# Altium PCB BOARD 3.pcbdoc
Units mil, origin at the board's own origin, x right, y up, seen from the top; angles counter-clockwise.
Board outline 6225 x 7025 mil, 8 copper layers (TopLayer, MidLayer1, MidLayer2, MidLayer3, MidLayer4, MidLayer5, MidLayer6, BottomLayer); 253 components, 548 nets, 2588 pads, 0 vias.
Unrouted connection lines stored in the file: 1490.
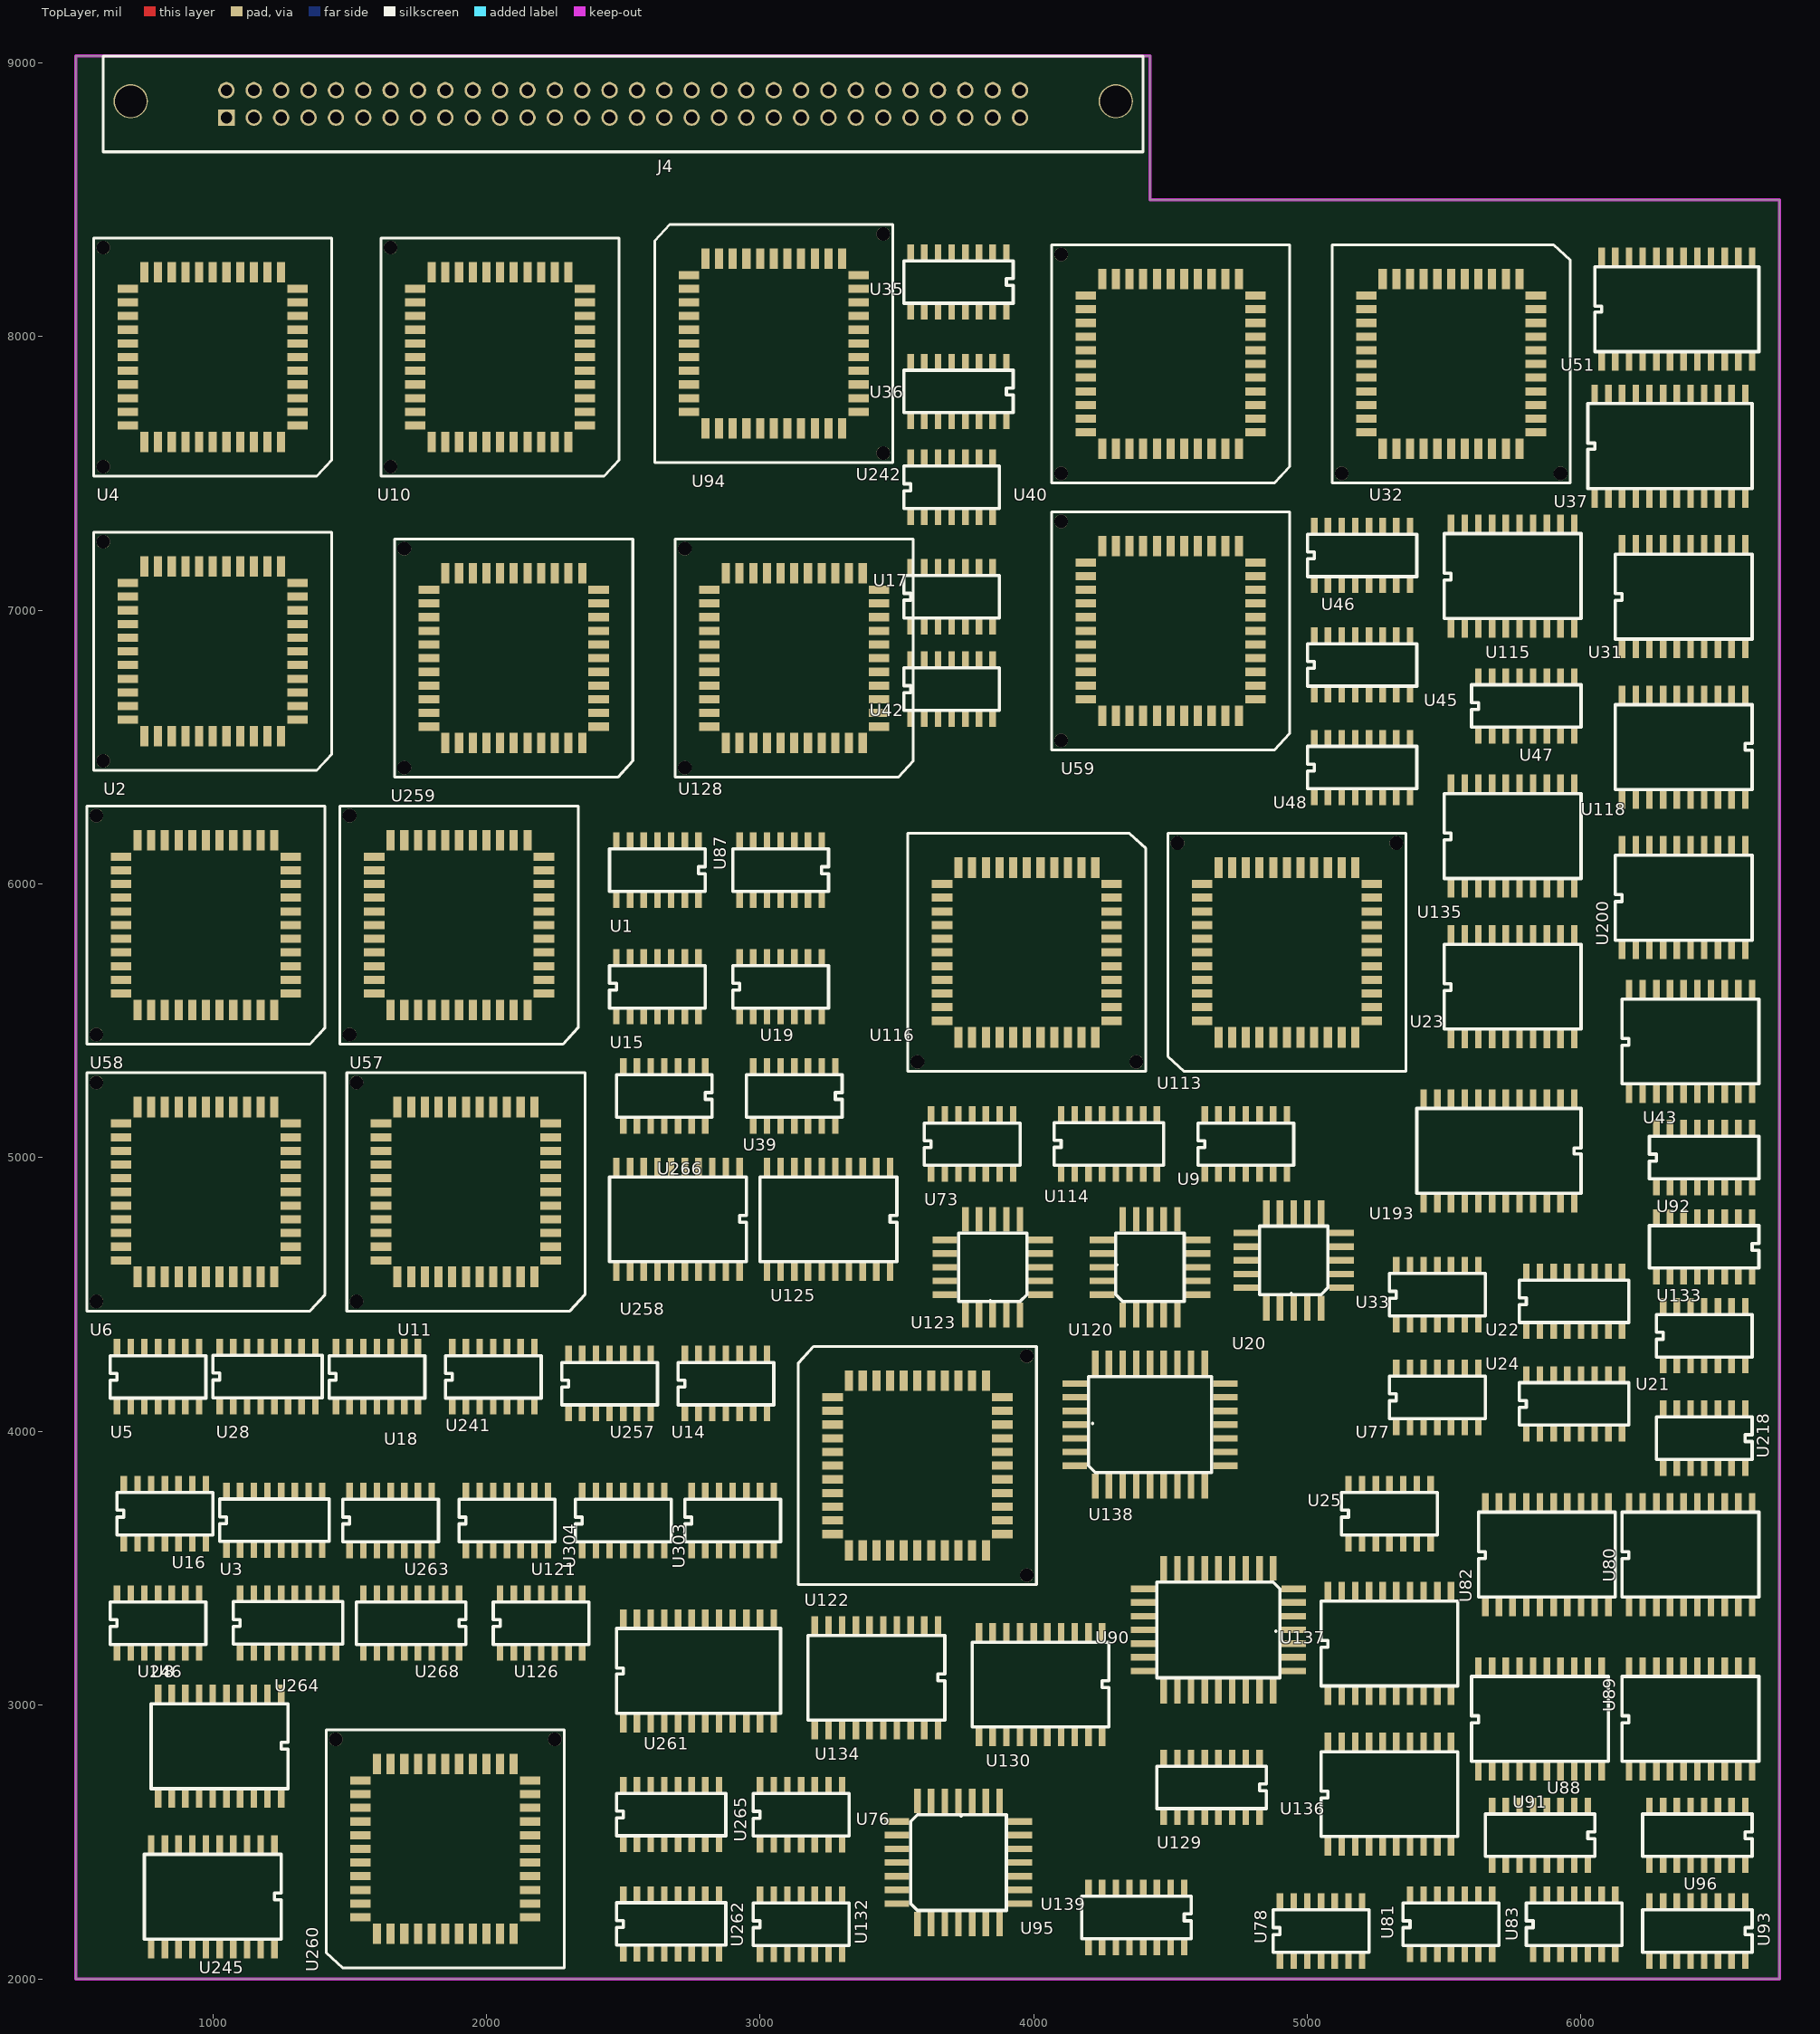
[diagram p0: TopLayer view]
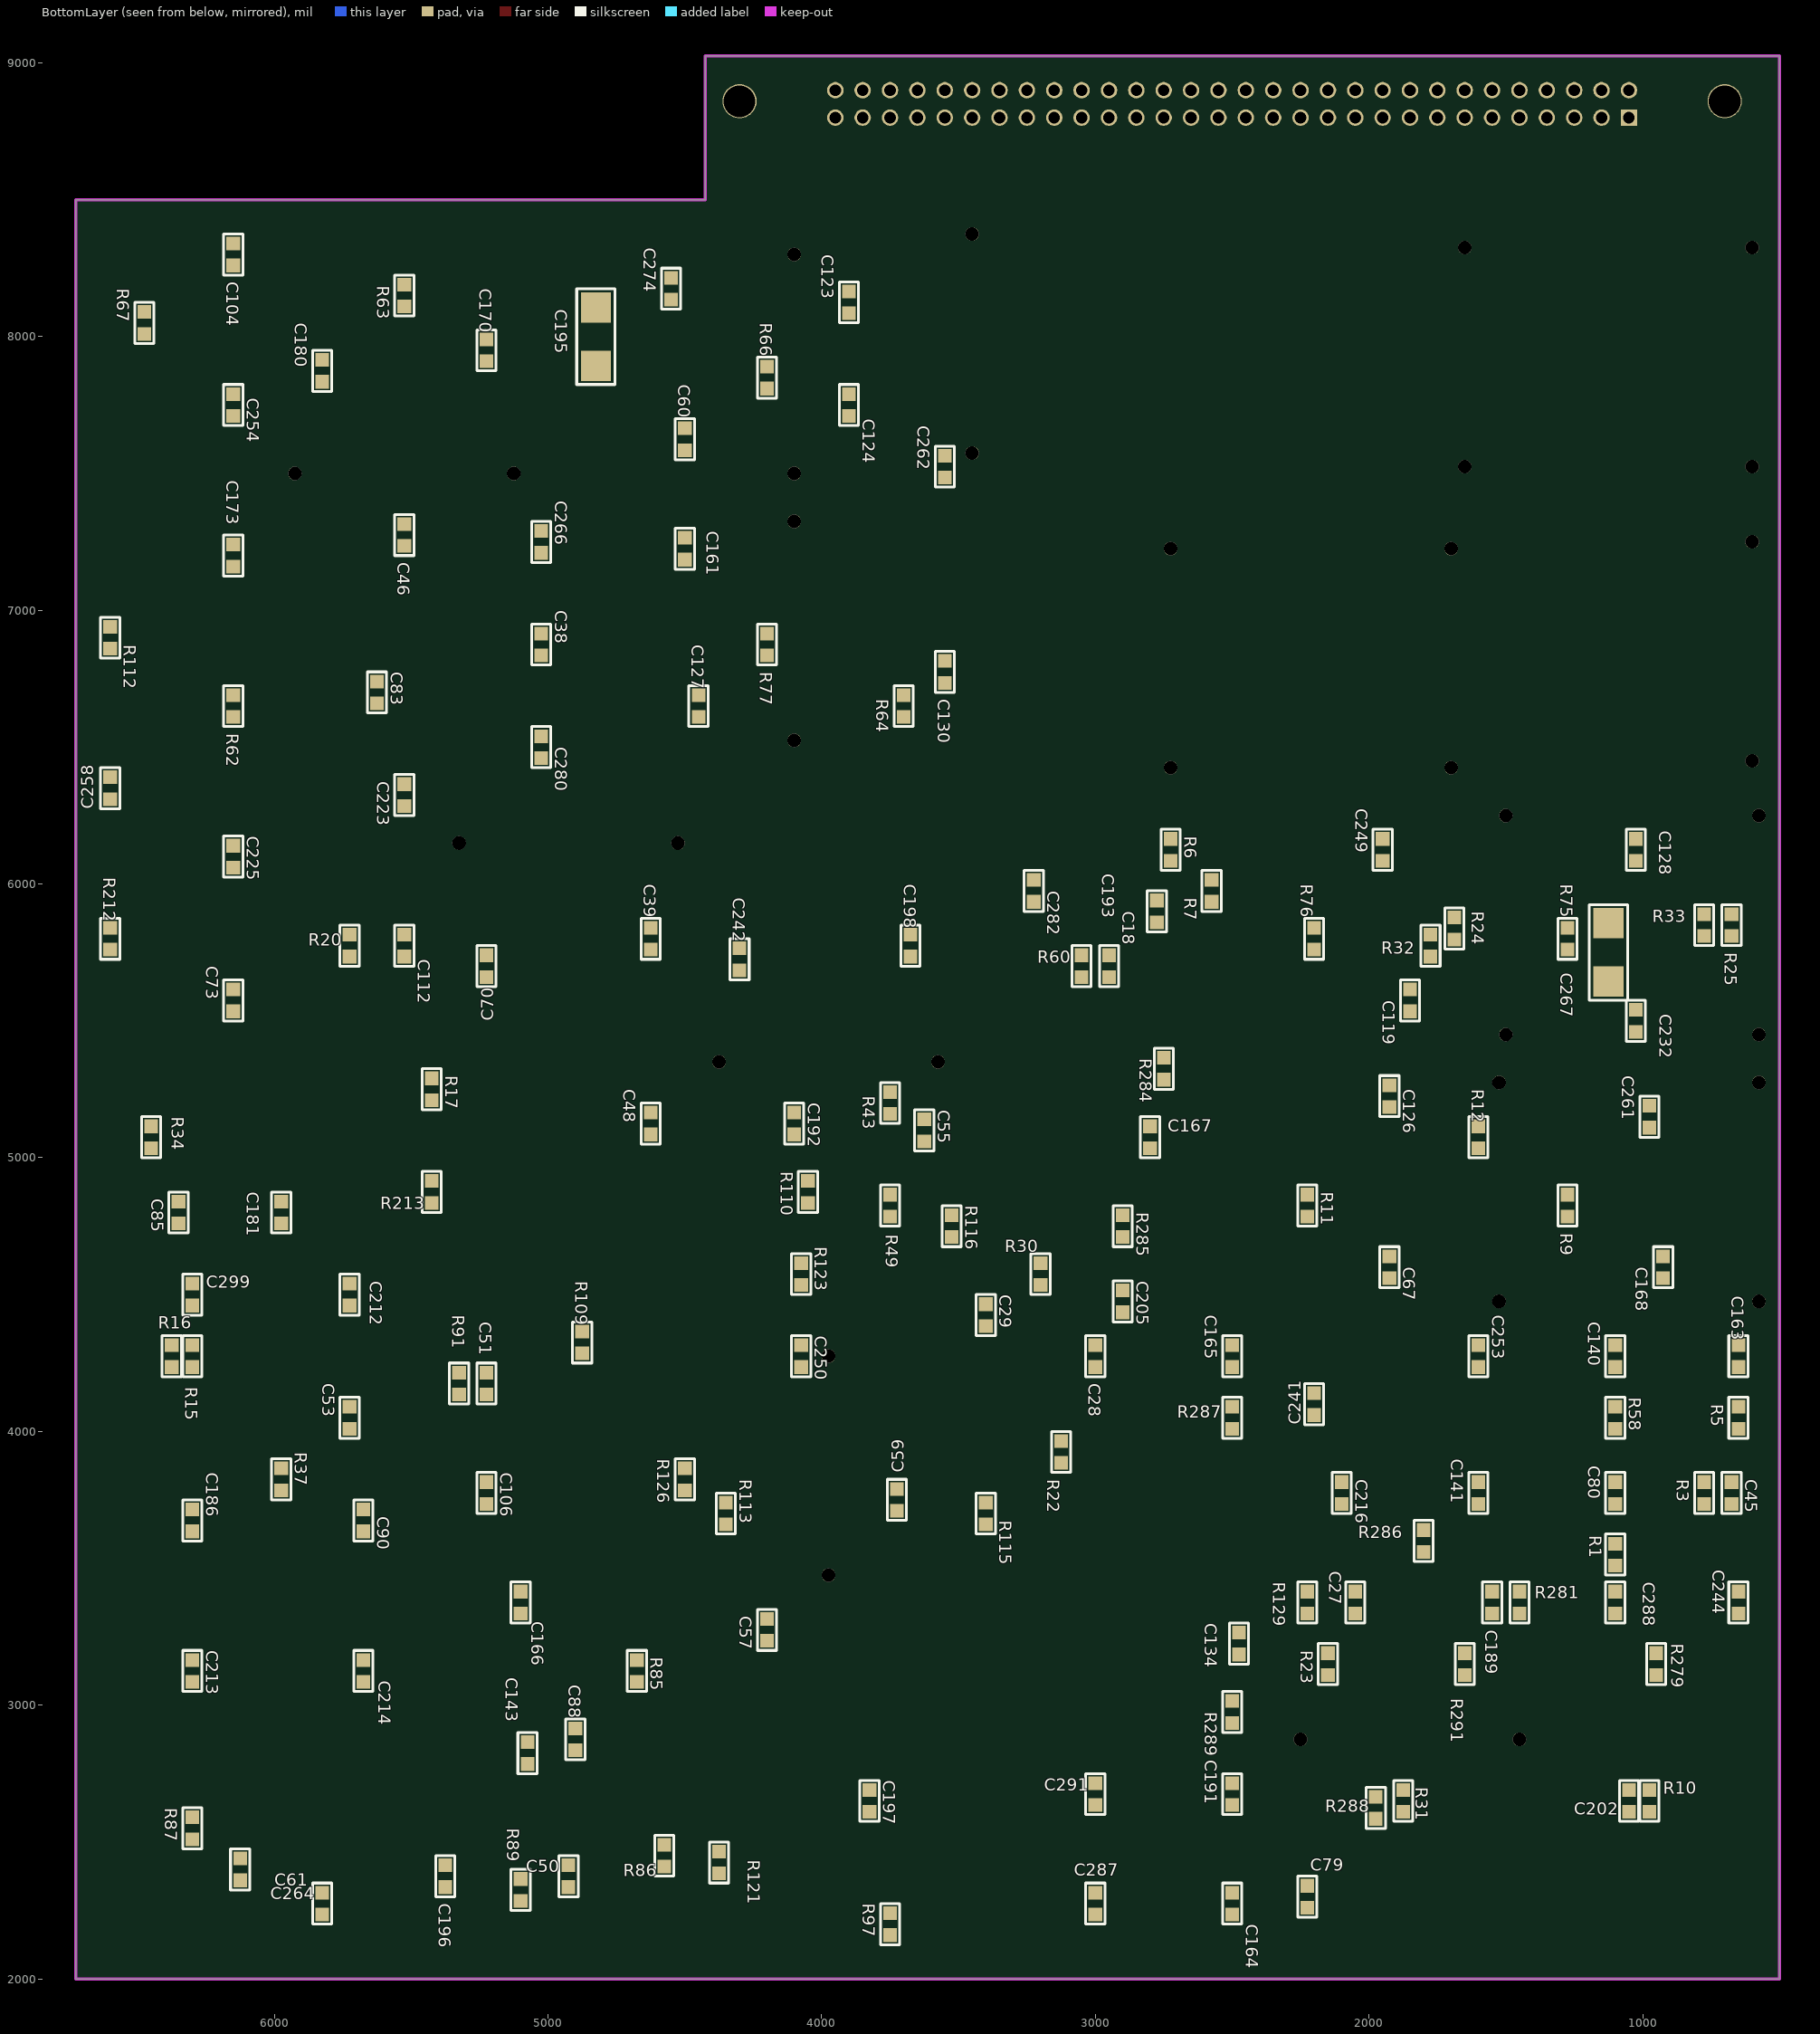
[diagram p1: BottomLayer view, seen from below]

## Layer stack, top to bottom
TopLayer: signal copper 1.4
Dielectric: core 12.6, FR-4, Dk 4.8
MidLayer1: signal copper 1.4
Dielectric: prepreg 12.6, FR-4, Dk 4.8
MidLayer2: signal copper 1.4
Dielectric: core 12.6, FR-4, Dk 4.8
MidLayer3: signal copper 1.4
Dielectric: prepreg 12.6, FR-4, Dk 4.8
MidLayer4: signal copper 1.4
Dielectric: core 12.6, FR-4, Dk 4.8
MidLayer5: signal copper 1.4
Dielectric: prepreg 12.6, FR-4, Dk 4.8
MidLayer6: signal copper 1.4
Dielectric: core 12.6, FR-4, Dk 4.8
BottomLayer: signal copper 1.4

## Board outline
500,2000 500,9025 4425,9025 4425,8500 6725,8500 6725,2000 500,2000

## Design rules (kind name [scope] priority, off if disabled: settings)
Clearance [All] p1: gap=6
FabricationTestPointUsage TestPointUsage [All] p1: valid=0 allowmultiple=FALSE
FabricationTestpoint Testpoint [All] p1: side=3 testpointundercomponent=TRUE minsize=40 maxsize=100 preferedsize=60 minholesize=20 maxholesize=40 preferedholesize=32 testpointgrid=1 allowsidetop=TRUE allowsidebottom=TRUE usegrid=TRUE gridtolerance=0.01
PlaneClearance [All] p1: clearance=10
PolygonConnect [All] p1: connectstyle=Relief reliefconductorwidth=10 reliefentries=4 polygonreliefangle="90 Angle"
RoutingTopology [InNet('GND')] p1: topology=Horizontal
RoutingTopology RoutingTopology_1 [InNet('VDD')] p2: topology=Horizontal
RoutingTopology RoutingTopology_2 [All] p3: topology=Shortest
RoutingVias [All] p1: holewidth=20 width=32 viastyle="Through Hole" minholewidth=20 minwidth=30 maxholewidth=28 maxwidth=50
SilkscreenOverComponentPads [All] p1: minsilkscreentomaskgap=10
SolderMaskExpansion [All] p1: expansion=2
Width Width_5 [InNet('N4')] p1: maxlimit=10 minlimit=10 preferedwidth=10
Width Width_4 [InNet('SCLK')] p2: maxlimit=10 minlimit=10 preferedwidth=10
Width Width_7 [InNet('SYMCLKM')] p3: maxlimit=10 minlimit=10 preferedwidth=10
Width Width_6 [InNet('SYMCLKN')] p4: maxlimit=10 minlimit=10 preferedwidth=10
Width Width_1 [InNet('GND1')] p5: maxlimit=10 minlimit=10 preferedwidth=10
Width [InNet('VDD1')] p6: maxlimit=10 minlimit=10 preferedwidth=10
Width Width_3 [InNet('SYMCLK')] p7: maxlimit=10 minlimit=10 preferedwidth=10
Width Width_2 [InNet('SYMCLK1')] p8: maxlimit=10 minlimit=10 preferedwidth=10
Width Width_8 [InNet('N22')] p9: maxlimit=10 minlimit=10 preferedwidth=10
Width Width_13 [InNet('5MHZ')] p10: maxlimit=20 minlimit=20 preferedwidth=20
Width Width_14 [InNet('VDD')] p11: maxlimit=20 minlimit=20 preferedwidth=20
Width Width_15 [InNet('GND')] p12: maxlimit=20 minlimit=20 preferedwidth=20
Width Width_12 [InNet('SYMCLK2')] p13: maxlimit=20 minlimit=20 preferedwidth=20
Width Width_9 [InNet('BITCLK1')] p14: maxlimit=10 minlimit=10 preferedwidth=10
Width Width_10 [InNet('BITCLK')] p15: maxlimit=10 minlimit=10 preferedwidth=10
Width Width_11 [InNet('20MHZ1')] p16: maxlimit=10 minlimit=10 preferedwidth=10
Width Width_16 [All] p17: maxlimit=6 minlimit=6 preferedwidth=6
23 further rules are at their usual default settings.

## Components (designator, comment, footprint, x,y, rotation, side; value= is the part's Value field where it differs from the comment)
C18 "C0805" 0805 2775,5900 r270 bottom
C27 "C0805" 0805 2050,3375 r270 bottom
C28 "C0805" 0805 3000,4275 r270 bottom
C29 "C0805" 0805 3400,4425 r270 bottom
C38 "C0805" 0805 5025,6875 r270 bottom
C39 "C0805" 0805 4625,5800 r270 bottom
C45 "C0805" 0805 675,3775 r270 bottom
C46 "C0805" 0805 5525,7275 r270 bottom
C48 "C0805" 0805 4625,5125 r270 bottom
C50 "C0805" 0805 4925,2375 r270 bottom
C51 "C0805" 0805 5225,4175 r270 bottom
C53 "C0805" 0805 5725,4050 r270 bottom
C55 "C0805" 0805 3625,5100 r270 bottom
C57 "C0805" 0805 4200,3275 r270 bottom
C59 "C0805" 0805 3725,3750 r90 bottom
C60 "C0805" 0805 4500,7625 r270 bottom
C61 "C0805" 0805 6125,2400 r90 bottom
C67 "C0805" 0805 1925,4600 r270 bottom
C70 "C0805" 0805 5225,5700 r90 bottom
C73 "C0805" 0805 6150,5575 r270 bottom
C79 "C0805" 0805 2225,2300 r90 bottom
C80 "C0805" 0805 1100,3775 r270 bottom
C83 "C0805" 0805 5625,6700 r270 bottom
C85 "C0805" 0805 6350,4800 r270 bottom
C88 "C0805" 0805 4900,2875 r90 bottom
C90 "C0805" 0805 5675,3675 r270 bottom
C104 "C0805" 0805 6150,8300 r270 bottom
C106 "C0805" 0805 5225,3775 r270 bottom
C112 "C0805" 0805 5525,5775 r270 bottom
C119 "C0805" 0805 1850,5575 r90 bottom
C123 "C0805" 0805 3900,8125 r90 bottom
C124 "C0805" 0805 3900,7750 r90 bottom
C126 "C0805" 0805 1925,5225 r270 bottom
C127 "C0805" 0805 4450,6650 r90 bottom
C128 "C0805" 0805 1025,6125 r270 bottom
C130 "C0805" 0805 3550,6775 r270 bottom
C134 "C0805" 0805 2475,3225 r270 bottom
C140 "C0805" 0805 1100,4275 r270 bottom
C141 "C0805" 0805 1600,3775 r270 bottom
C143 "C0805" 0805 5075,2825 r270 bottom
C161 "C0805" 0805 4500,7225 r90 bottom
C163 "C0805" 0805 650,4275 r270 bottom
C164 "C0805" 0805 2500,2275 r270 bottom
C165 "C0805" 0805 2500,4275 r270 bottom
C166 "C0805" 0805 5100,3375 r270 bottom
C167 "C0805" 0805 2800,5075 r270 bottom
C168 "C0805" 0805 925,4600 r90 bottom
C170 "C0805" 0805 5225,7950 r270 bottom
C173 "C0805" 0805 6150,7200 r270 bottom
C180 "C0805" 0805 5825,7875 r90 bottom
C181 "C0805" 0805 5975,4800 r270 bottom
C186 "C0805" 0805 6300,3675 r270 bottom
C189 "C0805" 0805 1550,3375 r90 bottom
C191 "C0805" 0805 2500,2675 r270 bottom
C192 "C0805" 0805 4100,5125 r270 bottom
C193 "C0805" 0805 2950,5700 r270 bottom
C195 "6032JK" 6032JK 4825,8000 r270 bottom
C196 "C0805" 0805 5375,2375 r270 bottom
C197 "C0805" 0805 3825,2650 r270 bottom
C198 "C0805" 0805 3675,5775 r270 bottom
C202 "C0805" 0805 1050,2650 r270 bottom
C205 "C0805" 0805 2900,4475 r270 bottom
C212 "C0805" 0805 5725,4500 r90 bottom
C213 "C0805" 0805 6300,3125 r270 bottom
C214 "C0805" 0805 5675,3125 r270 bottom
C216 "C0805" 0805 2100,3775 r270 bottom
C223 "C0805" 0805 5525,6325 r270 bottom
C225 "C0805" 0805 6150,6100 r270 bottom
C232 "C0805" 0805 1025,5500 r90 bottom
C241 "C0805" 0805 2200,4100 r270 bottom
C242 "C0805" 0805 4300,5725 r90 bottom
C244 "C0805" 0805 650,3375 r270 bottom
C249 "C0805" 0805 1950,6125 r270 bottom
C250 "C0805" 0805 4075,4275 r270 bottom
C253 "C0805" 0805 1600,4275 r270 bottom
C254 "C0805" 0805 6150,7750 r270 bottom
C258 "C0805" 0805 6600,6350 r90 bottom
C261 "C0805" 0805 975,5150 r90 bottom
C262 "C0805" 0805 3550,7525 r90 bottom
C264 "C0805" 0805 5825,2275 r270 bottom
C266 "C0805" 0805 5025,7250 r270 bottom
C267 "6032JK" 6032JK 1125,5750 r90 bottom
C274 "C0805" 0805 4550,8175 r270 bottom
C280 "C0805" 0805 5025,6500 r270 bottom
C282 "C0805" 0805 3225,5975 r270 bottom
C287 "C0805" 0805 3000,2275 r270 bottom
C288 "C0805" 0805 1100,3375 r90 bottom
C291 "C0805" 0805 3000,2675 r270 bottom
C299 "C0805" 0805 6300,4500 r90 bottom
J4 "CONN\60P" CONN\60P 1050,8800 r0 top
R1 "R0805" 0805 1100,3550 r90 bottom
R3 "R0805" 0805 775,3775 r270 bottom
R5 "R0805" 0805 650,4050 r90 bottom
R6 "R0805" 0805 2725,6125 r90 bottom
R7 "R0805" 0805 2575,5975 r270 bottom
R9 "R0805" 0805 1275,4825 r270 bottom
R10 "R0805" 0805 975,2650 r90 bottom
R11 "R0805" 0805 2225,4825 r270 bottom
R12 "R0805" 0805 1600,5075 r90 bottom
R15 "R0805" 0805 6300,4275 r270 bottom
R16 "R0805" 0805 6375,4275 r270 bottom
R17 "R0805" 0805 5425,5250 r270 bottom
R20 "R0805" 0805 5725,5775 r90 bottom
R22 "R0805" 0805 3125,3925 r90 bottom
R23 "R0805" 0805 2150,3150 r90 bottom
R24 "R0805" 0805 1687.5,5837.5 r90 bottom
R25 "R0805" 0805 675,5850 r270 bottom
R30 "R0805" 0805 3200,4575 r270 bottom
R31 "R0805" 0805 1875,2650 r90 bottom
R32 "R0805" 0805 1775,5775 r90 bottom
R33 "R0805" 0805 775,5850 r270 bottom
R34 "R0805" 0805 6450,5075 r90 bottom
R37 "R0805" 0805 5975,3825 r90 bottom
R43 "R0805" 0805 3750,5200 r270 bottom
R49 "R0805" 0805 3750,4825 r90 bottom
R58 "R0805" 0805 1100,4050 r90 bottom
R60 "R0805" 0805 3050,5700 r90 bottom
R62 "R0805" 0805 6150,6650 r270 bottom
R63 "R0805" 0805 5525,8150 r270 bottom
R64 "R0805" 0805 3700,6650 r270 bottom
R66 "R0805" 0805 4200,7850 r270 bottom
R67 "R0805" 0805 6475,8050 r90 bottom
R75 "R0805" 0805 1275,5800 r270 bottom
R76 "R0805" 0805 2200,5800 r270 bottom
R77 "R0805" 0805 4200,6875 r270 bottom
R85 "R0805" 0805 4675,3125 r270 bottom
R86 "R0805" 0805 4575,2450 r270 bottom
R87 "R0805" 0805 6300,2550 r270 bottom
R89 "R0805" 0805 5100,2325 r270 bottom
R91 "R0805" 0805 5325,4175 r270 bottom
R97 "R0805" 0805 3750,2200 r270 bottom
R109 "R0805" 0805 4875,4325 r270 bottom
R110 "R0805" 0805 4050,4875 r90 bottom
R112 "R0805" 0805 6600,6900 r90 bottom
R113 "R0805" 0805 4350,3700 r90 bottom
R115 "R0805" 0805 3400,3700 r270 bottom
R116 "R0805" 0805 3525,4750 r90 bottom
R121 "R0805" 0805 4375,2425 r270 bottom
R123 "R0805" 0805 4075,4575 r270 bottom
R126 "R0805" 0805 4500,3825 r90 bottom
R129 "R0805" 0805 2225,3375 r90 bottom
R212 "R0805" 0805 6600,5800 r270 bottom
R213 "R0805" 0805 5425,4875 r90 bottom
R279 "R0805" 0805 950,3150 r270 bottom
R281 "R0805" 0805 1450,3375 r90 bottom
R284 "R0805" 0805 2750,5325 r270 bottom
R285 "R0805" 0805 2900,4750 r90 bottom
R286 "R0805" 0805 1800,3600 r90 bottom
R287 "R0805" 0805 2500,4050 r90 bottom
R288 "R0805" 0805 1975,2625 r90 bottom
R289 "R0805" 0805 2500,2975 r270 bottom
R291 "R0805" 0805 1650,3150 r90 bottom
U1 "74ALS74" DIP14\SO 2625,6050 r180 top
U2 "MSSY-44S" CC44AMP 1000,6850 r0 top
U3 "74AS174" DIP16\SO 1225,3675 r0 top
U4 "MSYM-44S" CC44AMP 1000,7925 r0 top
U5 "74ALS74" DIP14\SO 800,4200 r0 top
U6 "SLT-44S" CC44AMP 975,4875 r0 top
U8 "74AS11" DIP14\SO 800,3300 r0 top
U9 "74ALS00" DIP14\SO 4775,5050 r0 top
U10 "TXMSG-44S" CC44AMP 2050,7925 r0 top
U11 "MSG-44S" CC44AMP 1925,4875 r0 top
U14 "74AS32" DIP14\SO 2875,4175 r0 top
U15 "74ALS08" DIP14\SO 2625,5625 r0 top
U16 "74ALS74" DIP14\SO 825,3700 r0 top
U17 "74ALS32" DIP14\SO 3700,7050 r0 top
U18 "74ALS74" DIP14\SO 1600,4200 r0 top
U19 "74ALS74" DIP14\SO 3075,5625 r0 top
U20 "BCGEN-P16V8-25" CC20 4950,4625 r0 top
U21 "74ALS74" DIP14\SO 6450,4350 r0 top
U22 "74ALS153" DIP16\SO 5975,4475 r0 top
U23 "74FCT574T" DIP20\SOL 5750,5625 r0 top
U24 "74ALS163" DIP16\SO 5975,4100 r0 top
U25 "74AS74" DIP14\SO 5300,3700 r0 top
U28 "74ALS175" DIP16\SO 1200,4200 r0 top
U31 "74FCT574T" DIP20\SOL 6375,7050 r0 top
U32 "PRM-44S" CC44AMP 5525,7900 r90 top
U33 "74AS08" DIP14\SO 5475,4500 r0 top
U35 "74ALS174" DIP16\SO 3725,8200 r180 top
U36 "74ALS174" DIP16\SO 3725,7800 r180 top
U37 "74FCT821T" DIP24\SOL 6325,7600 r0 top
U39 "74ALS08" DIP14\SO 3125,5225 r180 top
U40 "AGC-44S" CC44AMP 4500,7900 r0 top
U42 "74AS74" DIP14\SO 3700,6712.5 r0 top
U43 "74QCT244" DIP20\SOL 6400,5425 r0 top
U45 "74ALS174" DIP16\SO 5200,6800 r0 top
U46 "74ALS174" DIP16\SO 5200,7200 r0 top
U47 "74ALS174" DIP16\SO 5800,6650 r0 top
U48 "74ALS174" DIP16\SO 5200,6425 r0 top
U51 "74FCT821T" DIP24\SOL 6350,8100 r0 top
U57 "VAL-MACH210-20" CC44AMP 1900,5850 r0 top
U58 "TCTL_MACH210-20" CC44AMP 975,5850 r0 top
U59 "PCMP-MACH210-20" CC44AMP 4500,6925 r0 top
U73 "74ALS74" DIP14\SO 3775,5050 r0 top
U76 "74AS08" DIP14\SO 3150,2600 r0 top
U77 "74ALS74" DIP14\SO 5475,4125 r0 top
U78 "74ALS74" DIP14\SO 5050,2175 r0 top
U80 "74FCT245T" DIP20\SOL 6400,3550 r0 top
U81 "74AS32" DIP14\SO 5525,2200 r0 top
U82 "74FCT245T" DIP20\SOL 5875,3550 r0 top
U83 "74AS02" DIP14\SO 5975,2200 r0 top
U87 "74AS08" DIP14\SO 3075,6050 r180 top
U88 "74ALS169" DIP16\SO 5850,2525 r180 top
U89 "74FCT574T" DIP20\SOL 6400,2950 r0 top
U90 "AM7200-35A" CCR32 4675,3275 r90 top
U91 "74FCT574T" DIP20\SOL 5850,2950 r0 top
U92 "74ALS175" DIP16\SO 6450,5000 r0 top
U93 "74ALS169" DIP16\SO 6425,2175 r180 top
U94 "TXDMA-44S" CC44AMP 3050,7975 r180 top
U95 "DARB-P22V10-15" CC28 3725,2425 r180 top
U96 "74ALS169" DIP16\SO 6425,2525 r180 top
U113 "PEISR_MACH210-20" CC44AMP 4925,5750 r270 top
U114 "74AS174" DIP16\SO 4275,5050 r0 top
U115 "74FCT244T" DIP20\SOL 5750,7125 r0 top
U116 "PECMD-44S" CC44AMP 3975,5750 r90 top
U118 "74FCT573T" DIP20\SOL 6375,6500 r180 top
U120 "DMATO_PAL16V8-25" CC20 4425,4600 r270 top
U121 "74AS02" DIP14\SO 2075,3675 r0 top
U122 "PADD-44S" CC44AMP 3575,3875 r180 top
U123 "82S123" CC20 3850,4600 r0 top
U125 "74ALS521A" DIP20\SOL 3250,4775 r180 top
U126 "74ALS74" DIP14\SO 2200,3300 r0 top
U128 "RXDMA-44S" CC44AMP 3125,6825 r0 top
U129 "74ALS161" DIP16\SO 4650,2700 r180 top
U130 "74FCT574T" DIP20\SOL 4025,3075 r180 top
U132 "74ALS74" DIP14\SO 3150,2200 r0 top
U133 "74ALS161" DIP16\SO 6450,4675 r180 top
U134 "74FCT574T" DIP20\SOL 3425,3100 r180 top
U135 "74QCT244" DIP20\SOL 5750,6175 r0 top
U136 "74FCT574T" DIP20\SOL 5300,2675 r0 top
U137 "74FCT574T" DIP20\SOL 5300,3225 r0 top
U138 "AM7200-35A" CCR32 4425,4025 r270 top
U139 "74ALS161" DIP16\SO 4375,2225 r180 top
U193 "74ALS666" DIP24\SOL 5700,5025 r180 top
U200 "74FCT541T" DIP20\SOL 6375,5950 r0 top
U218 "74AS32" DIP14\SO 6450,3975 r180 top
U241 "74ALS04" DIP14\SO 2025,4200 r0 top
U242 "74ALS32" DIP14\SO 3700,7450 r0 top
U245 "74FCT540T" DIP20\SOL 1000,2300 r180 top
U246 "74FCT540T" DIP20\SOL 1025,2850 r180 top
U257 "74ALS74" DIP14\SO 2450,4175 r0 top
U258 "74ALS374" DIP20\SOL 2700,4775 r180 top
U259 "CRC-44S" CC44AMP 2100,6825 r0 top
U260 "FIF-44S" CC44AMP 1850,2475 r270 top
U261 "74FCT821T" DIP24\SOL 2775,3125 r0 top
U262 "74AS157" DIP16\SO 2675,2200 r0 top
U263 "74ALS74" DIP14\SO 1650,3675 r0 top
U264 "74F194" DIP16\SO 1275,3300 r0 top
U265 "74F166" DIP16\SO 2675,2600 r0 top
U266 "74ALS164" DIP14\SO 2650,5225 r180 top
U268 "74AS153" DIP16\SO 1725,3300 r180 top
U303 "74AS74" DIP14\SO 2900,3675 r0 top
U304 "74AS74" DIP14\SO 2500,3675 r0 top

## Footprints (in the part's own frame and the unit in brackets; to place one, negate y for a bottom-side part, rotate by r counter-clockwise, add the part's x,y. Pads: shape width x height; smd on the part's side, far side on the other; paste and mask are expansions set on the pad)
0805 [mil]
  rect 50x50 smd: 1(-40,0) 2(40,0)
  silkscreen extent -75,-35 75,35
6032JK [mil]
  rect 110x110 smd: 1(-106,0) 2(107,0)
  silkscreen extent -175,-70 175,70
CC20 [mil]
  rect 24x90 smd: 1(0,-175) 2(50,-175) 3(100,-175) 9(100,175) 10(50,175) 11(0,175) 12(-50,175) 13(-100,175) 19(-100,-175) 20(-50,-175)
  rect 90x24 smd: 4(175,-100) 5(175,-50) 6(175,0) 7(175,50) 8(175,100) 14(-175,100) 15(-175,50) 16(-175,0) 17(-175,-50) 18(-175,-100)
  silkscreen extent -125,-125 125,125
CC28 [mil]
  rect 24x90 smd: 1(0,-225) 2(50,-225) 3(100,-225) 4(150,-225) 12(150,225) 13(100,225) 14(50,225) 15(0,225) 16(-50,225) 17(-100,225) 18(-150,225) 26(-150,-225) 27(-100,-225) 28(-50,-225)
  rect 90x24 smd: 5(225,-150) 6(225,-100) 7(225,-50) 8(225,0) 9(225,50) 10(225,100) 11(225,150) 19(-225,150) 20(-225,100) 21(-225,50) 22(-225,0) 23(-225,-50) 24(-225,-100) 25(-225,-150)
  silkscreen extent -175,-175 175,175
CC44AMP [mil]
  rect 30x75 smd: 1(0,-310) 2(50,-310) 3(100,-310) 4(150,-310) 5(200,-310) 6(250,-310) 18(250,310) 19(200,310) 20(150,310) 21(100,310) 22(50,310) 23(0,310) 24(-50,310) 25(-100,310) 26(-150,310) 27(-200,310) 28(-250,310) 40(-250,-310) 41(-200,-310) 42(-150,-310) 43(-100,-310) 44(-50,-310)
  rect 75x30 smd: 7(310,-250) 8(310,-200) 9(310,-150) 10(310,-100) 11(310,-50) 12(310,0) 13(310,50) 14(310,100) 15(310,150) 16(310,200) 17(310,250) 29(-310,250) 30(-310,200) 31(-310,150) 32(-310,100) 33(-310,50) 34(-310,0) 35(-310,-50) 36(-310,-100) 37(-310,-150) 38(-310,-200) 39(-310,-250)
  round 50 hole 50: 45(-400,-400) 46(-400,400)
  silkscreen extent -435,-435 435,435
CCR32 [mil]
  rect 24x90 smd: 1(0,-275) 2(50,-275) 3(100,-275) 4(150,-275) 14(150,275) 15(100,275) 16(50,275) 17(0,275) 18(-50,275) 19(-100,275) 20(-150,275) 30(-150,-275) 31(-100,-275) 32(-50,-275)
  rect 90x24 smd: 5(225,-200) 6(225,-150) 7(225,-100) 8(225,-50) 9(225,0) 10(225,50) 11(225,100) 12(225,150) 13(225,200) 21(-225,200) 22(-225,150) 23(-225,100) 24(-225,50) 25(-225,0) 26(-225,-50) 27(-225,-100) 28(-225,-150) 29(-225,-200)
  silkscreen extent -175,-225 175,225
CONN\60P [mil]
  rect 60x60 / inner round 60 / far side rect 60x60 hole 42: 1(0,0)
  round 60 hole 42: 2(0,100) 3(100,0) 4(100,100) 5(200,0) 6(200,100) 7(300,0) 8(300,100) 9(400,0) 10(400,100) 11(500,0) 12(500,100) 13(600,0) 14(600,100) 15(700,0) 16(700,100) 17(800,0) 18(800,100) 19(900,0) 20(900,100) 21(1000,0) 22(1000,100) 23(1100,0) 24(1100,100) 25(1200,0) 26(1200,100) 27(1300,0) 28(1300,100) 29(1400,0) 30(1400,100) 31(1500,0) 32(1500,100) 33(1600,0) 34(1600,100) 35(1700,0) 36(1700,100) 37(1800,0) 38(1800,100) 39(1900,0) 40(1900,100) 41(2000,0) 42(2000,100) 43(2100,0) 44(2100,100) 45(2200,0) 46(2200,100) 47(2300,0) 48(2300,100) 49(2400,0) 50(2400,100) 51(2500,0) 52(2500,100) 53(2600,0) 54(2600,100) 55(2700,0) 56(2700,100) 57(2800,0) 58(2800,100) 59(2900,0) 60(2900,100)
  round 125 hole 116: 61(-350,60) 62(3250,60)
  silkscreen extent -450,-125 3350,225
DIP14\SO [mil]
  rect 24x60 smd: 1(-150,-108) 2(-100,-108) 3(-50,-108) 4(0,-108) 5(50,-108) 6(100,-108) 7(150,-108) 8(150,108) 9(100,108) 10(50,108) 11(0,108) 12(-50,108) 13(-100,108) 14(-150,108)
  silkscreen extent -175,-78 175,77
DIP16\SO [mil]
  rect 24x60 smd: 1(-175,-107) 2(-125,-107) 3(-75,-107) 4(-25,-107) 5(25,-107) 6(75,-107) 7(125,-107) 8(175,-107) 9(175,108) 10(125,108) 11(75,108) 12(25,108) 13(-25,108) 14(-75,108) 15(-125,108) 16(-175,108)
  silkscreen extent -200,-77 200,78
DIP20\SOL [mil]
  rect 24x70 smd: 1(-225,-190) 2(-175,-190) 3(-125,-190) 4(-75,-190) 5(-25,-190) 6(25,-190) 7(75,-190) 8(125,-190) 9(175,-190) 10(225,-190) 11(225,190) 12(175,190) 13(125,190) 14(75,190) 15(25,190) 16(-25,190) 17(-75,190) 18(-125,190) 19(-175,190) 20(-225,190)
  silkscreen extent -250,-155 250,155
DIP24\SOL [mil]
  rect 24x70 smd: 1(-275,-190) 2(-225,-190) 3(-175,-190) 4(-125,-190) 5(-75,-190) 6(-25,-190) 7(25,-190) 8(75,-190) 9(125,-190) 10(175,-190) 11(225,-190) 12(275,-190) 13(275,190) 14(225,190) 15(175,190) 16(125,190) 17(75,190) 18(25,190) 19(-25,190) 20(-75,190) 21(-125,190) 22(-175,190) 23(-225,190) 24(-275,190)
  silkscreen extent -300,-155 300,155

## Nets (pads, with @x,y where several pads share a name; then routed paths per layer and width w, separated by ;. In a path a pad name is that pad's centre, name@x,y a point inside that pad or via, vN(x,y) a via of type N, cw(c..) or ccw(c..) an arc to the next point about the centre after c; other vN are vias at no path point)
5MHZ: U14.10 U17.6 U32.13 U36.9 U40.35 U42.3
8MHZ: R24.2 R32.2 U23.14 U57.35
20MHZ: U95.2 U113.35 U114.9 U116.35 U120.1 U132.3 U132.11
20MHZ1: U78.3 U81.2 U88.2 U93.2 U94.13 U96.2 U128.13
$4N5: R213.2 U193.14
$4N6: U193.2 U193.23
$4N15: R212.2 U200.3 U200.4 U200.5 U200.6 U200.7 U200.8 U200.9
$4N155: U193.1 U200.1 U200.19
$7N690: U9.12 U218.6
$7N842: U218.4 U218.10
$9N686: U262.3 U265.13
$9N693: U257.5 U259.10
$9N802: R284.2 U266.2 U266.9
$9N1110: U257.2 U260.24
$9N1173: U257.12 U260.29
$9N1174: U258.3 U266.3
$9N1176: U258.4 U266.4
$9N1178: U258.7 U266.5
$9N1180: U258.8 U266.6
$9N1182: U258.13 U266.10
$9N1184: U258.14 U266.11
$9N1186: U258.17 U266.12
$9N1207: U121.4 U257.3 U257.11
$9N1210: U257.9 U258.11
$9N1235: U258.18 U266.13
$9N1239: R285.2 U258.1 U259.29
$9N1242: U265.1 U265.9
$9N1243: U259.13 U260.25
$9N1264: U259.31 U262.4
$9N1270: U259.32 U262.7
$9N1271: U259.2 U262.6
$9N1295: U261.10 U261.16 U262.2
$9N1318: U260.39 U263.5
$9N1368: U260.9 U263.9
$9N1385: U260.41 U262.10
$9N1389: U259.43 U260.3 U261.2
$9N1394: U14.13 U121.6 U260.43
$9N1441: U261.3 U261.23
$9N1443: U261.4 U261.22
$9N1445: U261.5 U261.21
$9N1448: U261.6 U261.20
$9N1450: U261.7 U261.19
$9N1453: U261.8 U261.18
$9N1455: U261.9 U261.17
$9N1458: U261.11 U261.15
$9N1481: U262.13 U262.14 U262.15
$9N1482: U260.4 U262.5 U262.11 U268.7
$9N1576: R279.2 U264.2 U264.7
$9N1577: R281.2 U264.1 U264.9
$9N1587: U264.14 U268.6
$9N1589: U264.13 U268.5
$9N1591: U264.12 U268.4
$9N1593: R291.2 U268.3 U268.10 U268.11 U268.12 U268.13
$9N1605: U268.1 U268.15
$10N712: J4.20 U4.15 U9.5
$10N885: U18.2 U18.8
$10N891: U17.3 U18.13
$10N1426: R3.2 U16.10 U16.12 U303.4 U303.10
$10N1487: J4.16 U4.11 U11.33 U18.6
$10N1488: J4.40 U4.27 U10.19
$10N1491: U4.18 U16.11
$10N1493: U4.14 U5.2 U19.1
$10N1501: U4.2 U10.9
$10N1502: J4.12 U4.20 U10.8
$10N1524: U10.2 U18.11
$10N1528: U10.21 U11.3
$10N1583: R1.2 U3.1 U303.1 U303.13
$10N1614: R5.2 U5.1 U5.13
$10N1615: U5.4 U5.10
$10N1645: U6.19 U16.9
$10N1653: U2.4 U4.10 U17.10 U241.1
$10N1655: U6.4 U11.6
$10N1657: U6.9 U11.27
$10N1658: U6.7 U11.26
$10N1659: U6.2 U11.18
$10N1660: U6.5 U11.19
$10N1670: U6.24 U87.1
$10N1672: U8.2 U241.2
$10N1674: U8.1 U303.9
$10N1679: U5.12 U9.6
$10N1743: U11.16 U19.5
$10N1790: U6.8 U11.5
$10N1822: J4.10 U4.26 U10.20 U11.10
$10N1841: U14.1 U87.8
$10N1843: U8.13 U14.3 U304.5
$10N1854: U1.1 U15.8
$10N1856: U1.8 U15.10
$10N1858: U1.5 U1.12
$10N1860: U1.3 U4.25
$10N1893: U6.18 U15.11
$10N1902: U15.12 U17.8
$10N1904: U4.24 U15.13
$10N1906: U14.2 U87.3
$10N1909: U6.25 U87.2
$10N1955: U14.6 U87.9
$10N1961: U15.3 U16.2
$10N1967: U15.6 U16.1
$10N1978: U2.38 U8.11
$10N2014: U303.5 U303.12
$11N88: R58.2 U28.1
$11N111: U9.1 U21.6
$11N113: U9.3 U21.12
$11N119: R15.2 U21.1 U21.13
$11N122: R16.2 U21.4 U21.10
$11N125: U20.2 U21.8
$11N127: U20.15 U22.4
$11N129: U20.14 U22.5
$11N131: U20.13 U22.6
$11N139: U23.2 U23.3
$11N163: R17.1 U23.1
$11N165: U22.1 U22.3 U22.10 U22.11 U22.12 U22.13 U22.15
$11N242: R34.1 U20.11
$11N244: U22.7 U23.6
$11N255: U9.10 U24.12
$11N257: U9.8 U24.1 U25.2
$11N266: U25.1 U25.13
$11N268: U25.4 U25.10
$11N276: R37.2 U24.3 U24.4 U24.5 U24.6 U24.7 U24.9 U24.10
$11N290: U9.9 U24.14
$11N419: U42.8 U42.12
$11N424: U17.4 U17.5 U42.9
$12N175: U35.5 U36.4 U135.11 U135.13 U135.15 U135.17
$12N232: J4.28 U32.32 U36.12
$12N239: U135.19 U242.11
$12N293: U35.2 U36.3
$12N297: U35.7 U36.6
$12N299: U35.10 U36.11
$12N301: U35.12 U36.13
$12N303: U35.15 U36.14
$12N312: U32.37 U35.1 U36.1
$12N316: U31.11 U35.9 U242.3
$12N331: U31.19 U32.18
$12N333: U31.18 U32.17
$12N335: U31.17 U32.5
$12N337: U31.16 U32.33
$12N339: U31.15 U32.43
$12N341: U31.14 U32.21
$12N343: U31.13 U32.20
$12N345: U31.12 U32.19
$12N362: U37.11 U40.7
$12N364: U37.2 U40.6
$12N366: U37.9 U40.3
$12N368: U37.10 U40.5
$12N370: U37.8 U40.2
$12N372: U37.7 U40.40
$12N374: U37.6 U40.41
$12N376: U37.5 U40.42
$12N378: U37.4 U40.43
$12N380: U37.3 U40.8
$12N382: U19.11 U37.13 U39.2 U40.20
$12N497: U14.9 U42.6
$12N503: U14.8 U40.13
$12N505: U40.11 U42.5
$12N537: U42.2 U242.8
$14N494: U57.5 U59.35
$14N504: U57.21 U58.17 U59.16
$14N518: U57.14 U59.43
$14N521: U57.33 U59.20
$14N660: U58.43 U241.9
$14N672: U57.31 U58.38 U59.18
$14N674: U57.3 U58.33
$14N676: U57.19 U58.24 U59.11
$14N914: U58.18 U73.1
$14N989: U58.6 U73.5
$14N1063: U58.15 U59.38
$15N52: U89.12 U90.7 U91.12
$15N54: U89.13 U90.6 U91.13
$15N56: U89.14 U90.5 U91.14
$15N58: U89.15 U90.4 U91.15
$15N60: U89.16 U90.31 U91.16
$15N62: U89.17 U90.30 U91.17
$15N64: U89.18 U90.29 U91.18
$15N66: U89.19 U90.28 U91.19
$15N93: U89.11 U91.11
$15N97: J4.58 U78.5 U94.15
$15N99: U73.8 U88.7 U90.2 U93.7 U96.7
$15N118: U88.10 U93.15
$15N123: U88.15 U96.10
$15N155: U73.12 U94.3
$15N211: U77.9 U94.35 U113.3
$15N244: U76.3 U78.13
$15N262: U76.2 U241.4
$15N284: U80.19 U81.6 U82.19
$15N369: U39.6 U90.25
$15N394: U81.4 U83.10
$15N403: U81.5 U83.4
$15N413: U76.6 U78.11
$15N453: U39.5 U94.43
$15N498: U81.3 U92.9
$15N557: U94.24 U95.6
$15N559: U94.2 U95.7
$15N563: U94.26 U95.12
$15N583: U78.2 U90.9
$17N5: U113.43 U115.17
$17N7: U113.42 U115.13
$17N9: U113.24 U115.15
$17N11: U113.25 U115.11
$17N13: U113.26 U115.8
$17N15: U113.27 U115.6
$17N17: U113.28 U115.4
$17N19: U113.29 U115.2
$17N22: U113.6 U114.7 U116.6
$17N23: U113.7 U114.10 U116.27
$17N24: U113.5 U114.5 U116.7
$17N25: U113.8 U114.12 U116.29
$17N26: U113.38 U114.2 U116.16
$17N35: U87.4 U113.41
$17N53: U113.21 U116.39
$17N54: U113.20 U116.36
$17N56: U113.19 U116.41
$17N81: U116.40 U118.17
$17N82: U116.20 U118.16
$17N175: U39.8 U115.1 U115.19
$17N410: U81.11 U116.5
$17N422: U116.33 U118.18
$17N423: U116.13 U118.19
$17N521: U116.19 U118.15
$17N580: U87.5 U121.1
$17N584: U87.6 U116.4
$18N8: U43.1 U87.11
$18N9: U126.13 U129.1 U133.1 U139.1
$18N11: U126.5 U129.2 U133.2 U138.2 U139.2
$18N14: U130.2 U139.14
$18N15: U130.3 U139.13
$18N21: U129.7 U129.10 U139.15
$18N22: U133.14 U134.2
$18N23: U129.15 U133.7 U133.10
$18N39: U123.12 U125.3
$18N40: U123.9 U125.5
$18N41: U123.8 U125.7
$18N42: U123.7 U125.9 U304.14
$18N43: U123.5 U125.12
$18N44: U123.4 U125.14
$18N45: U123.3 U125.16
$18N46: U123.2 U125.18
$18N49: U122.29 U123.15
$18N50: U122.40 U123.14
$18N51: U122.25 U123.13
$18N71: U136.4 U137.4 U138.20
$18N72: U136.5 U137.5 U138.19
$18N73: U136.2 U137.2 U138.22
$18N90: U136.3 U137.3 U138.21
$18N98: U130.4 U139.12
$18N99: U129.14 U130.6
$18N100: U129.13 U130.7
$18N101: U129.12 U130.8
$18N102: U129.11 U130.9
$18N103: U122.37 U133.13 U134.3
$18N104: U122.38 U133.12 U134.4
$18N105: U133.11 U134.5
$18N125: U136.7 U137.7 U138.13
$18N142: U122.5 U125.19
$18N166: U136.8 U137.8 U138.11
$18N167: U136.6 U137.6 U138.14
$18N168: U136.9 U137.9 U138.10
$18N169: U136.1 U137.1
$18N211: U39.13 U128.18 U137.11
$18N212: U39.12 U128.17 U136.11
$18N213: U39.11 U138.18
$18N220: U128.14 U132.9
$18N222: U128.7 U130.5 U139.11
$18N257: U132.2 U138.24
$18N261: R113.2 U138.3
$18N267: U126.9 U132.12
$$$230: J4.48 U94.36
$$$1197: U11.2 U304.11
$$$1829: U6.10 U304.6
$$$2112: J4.50 U94.42
$$$2430: U2.13 U4.6
$$$2892: J4.6 U10.30
$$$3267: J4.32 U10.26
$$$4473: J4.44 U10.14
$$$6297: J4.52 U94.41
$$$6956: J4.26 U10.25
$$$7829: J4.18 U10.31
$$$9241: J4.30 U10.10
BCAST: U122.39 U128.25
BITCLK: U10.13 U14.12 U23.19 U121.5 U260.13 U263.3 U263.11 U264.11
BITCLK1: R20.2 U23.18
BORT: U2.9 U4.29 U58.14
BPD0: U82.9 U91.9 U136.12
BPD1: U82.8 U91.8 U136.13
BPD2: U82.7 U91.7 U136.14
BPD3: U82.6 U91.6 U136.15
BPD4: U82.5 U91.5 U136.16
BPD5: U82.4 U91.4 U136.17
BPD6: U82.3 U91.3 U136.18
BPD7: U82.2 U91.2 U136.19
BPD8: U80.9 U89.9 U137.12
BPD9: U80.8 U89.8 U137.13
BPD10: U80.7 U89.7 U137.14
BPD11: U80.6 U89.6 U137.15
BPD12: U80.5 U89.5 U137.16
BPD13: U80.4 U89.4 U137.17
BPD14: U80.3 U89.3 U137.18
BPD15: U80.2 U89.2 U137.19
BRATE0: U10.32 U22.14 U51.22 U260.11 U268.14
BRATE1: U10.11 U22.2 U51.23 U260.10 U268.2
BUFLOCK: J4.38 U43.8 U94.6 U121.3
BUSERR: U113.32 U116.15 U120.18
E0: U3.6 U246.14
E180: U3.11 U246.15
EOP: U10.5 U259.33 U260.42
ERR0: U43.2 U116.24
ERR1: U43.4 U116.25
ERR2: U43.6 U116.26
FCHIPDIV4M: U20.1 U21.3 U21.11 U23.11 U25.3 U25.11 U245.16
GND: C18.2 C27.2 C28.2 C29.2 C38.2 C39.2 C45.2 C46.2 C48.2 C50.2 C51.2 C53.2 C55.2 C57.2 C59.2 C60.2 C61.2 C67.2 C70.2 C73.2 C79.2 C80.2 C83.2 C85.2 C88.2 C90.2 C104.2 C106.2 C112.2 C119.2 C123.2 C124.2 C126.2 C127.2 C128.2 C130.2 C134.2 C140.2 C141.2 C143.2 C161.2 C163.2 C164.2 C165.2 C166.2 C167.2 C168.2 C170.2 C173.2 C180.2 C181.2 C186.2 C189.2 C191.2 C192.2 C193.2 C195.1 C196.2 C197.2 C198.2 C202.2 C205.2 C212.2 C213.2 C214.2 C216.2 C223.2 C225.2 C232.2 C241.2 C242.2 C244.2 C249.2 C250.2 C253.2 C254.2 C258.2 C261.2 C262.2 C264.2 C266.2 C267.1 C274.2 C280.2 C282.2 C287.2 C288.2 C291.2 C299.2 J4.1 J4.5 J4.9 J4.13 J4.17 J4.21 J4.22 J4.24 J4.25 J4.29 J4.33 J4.37 J4.41 J4.45 J4.49 J4.53 J4.57 R9.1 R10.1 R11.1 R12.1 R17.2 R30.1 R31.1 R32.1 R33.1 R34.2 R49.1 R62.1 R63.1 R66.1 R67.1 R75.1 R76.1 R77.1 R85.1 R87.1 R97.1 R109.1 R112.1 R115.1 R116.1 R121.1 R123.1 R279.1 R285.1 R288.1 R289.1 U1.7 U2.1 U2.12 U2.23 U2.34 U3.8 U4.1 U4.12 U4.23 U4.34 U5.7 U6.1 U6.12 U6.23 U6.34 U8.7 U9.7 U10.1 U10.12 U10.23 U10.34 U11.1 U11.12 U11.23 U11.34 U14.7 U15.7 U16.7 U17.7 U18.7 U19.7 U20.10 U21.7 U22.8 U23.10 U24.8 U25.7 U28.8 U31.10 U32.1 U32.12 U32.23 U32.34 U33.7 U35.8 U36.8 U37.12 U39.7 U40.1 U40.12 U40.23 U40.34 U42.7 U43.10 U45.8 U46.8 U47.8 U48.8 U51.12 U57.1 U57.12 U57.23 U57.34 U58.1 U58.12 U58.23 U58.34 U59.1 U59.12 U59.23 U59.34 U73.7 U76.7 U77.7 U78.7 U80.10 U81.7 U82.10 U83.7 U87.7 U88.8 U89.10 U90.16 U91.10 U92.8 U93.8 U94.1 U94.12 U94.23 U94.34 U95.14 U96.8 U113.1 U113.12 U113.23 U113.34 U114.8 U115.10 U116.1 U116.12 U116.23 U116.34 U118.10 U120.10 U121.7 U122.1 U122.12 U122.23 U122.34 U123.10 U125.10 U126.7 U128.1 U128.12 U128.23 U128.34 U129.8 U130.10 U132.7 U133.8 U134.10 U135.10 U136.10 U137.10 U138.16 U139.8 U193.12 U200.10 U218.7 U241.7 U242.7 U245.10 U246.10 U257.7 U258.10 U259.1 U259.12 U259.23 U259.34 U260.1 U260.12 U260.23 U260.34 U261.12 U262.8 U263.7 U264.8 U265.8 U266.7 U268.8 U303.7
GND1: J4.31 U6.40 U11.38 U32.25 U40.37 U113.18 U116.32
HOG: U1.9 U87.10
ISP4: U14.4 U92.10 U94.21
ISPON: U16.5 U242.9
ISRSEL0: U39.10 U113.10
ISRSEL1: U39.9 U113.11
L0: U3.13 U246.12
L180: U3.14 U246.13
LAST: U77.3 U94.7 U113.9
M0: U3.3 U246.16
M180: U3.4 U246.17
MS0: U2.30 U11.15
MS1: U2.31 U11.35
N1: U15.2 U92.6
N4: U87.13 U94.30
N5: U91.1 U94.5
N6: J4.46 U89.1 U94.4
N7: U90.18 U260.7 U265.15
N8: U94.28 U116.9
N10: U9.4 U58.42
N11: U57.13 U58.13 U59.33
N13: U114.6 U260.5
N14: U90.24 U263.2
N16: U15.4 U17.2 U18.5
N17: U218.12 U242.1
N21: U218.2 U242.13
N22: U3.9 U5.3 U23.4 U246.18
N33: U116.43 U128.33
N34: U114.11 U260.15
N35: U87.12 U116.28 U128.41 U130.1 U134.1
N37: U126.2 U260.14
N39: U138.9 U263.12
N41: U95.11 U128.28
N42: U128.24 U132.5
N43: U113.33 U116.17 U128.29
N46: U47.9 U48.9
N47: U4.13 U10.33 U11.32 U15.5 U15.9 U32.10 U39.1 U40.32 U45.1 U46.1 U47.1 U48.1 U122.33 U193.18 U260.32
N48: U95.23 U120.4
N55: U242.2 U242.12
N57: J4.39 U76.5 U94.27
N66: U2.5 U4.28 U10.6 U260.2 U262.1
N82: U135.16 U218.9
N87: U57.6 U59.17
N88: U114.13 U260.19
N90: U39.4 U76.1 U76.10 U92.1 U94.33 U95.4 U113.2 U116.10 U120.3
N91: U80.1 U82.1 U83.9 U95.21
N92: U76.9 U77.13 U81.1 U88.9 U93.9 U94.31 U96.9
N95: U19.3 U114.4 U259.42
N102: R23.2 R31.2 U23.15 U126.3
N111: R43.2 R49.2 U73.11
ORIGRQ: U78.9 U303.2
ORQ: U4.33 U8.12 U17.9
OWN: U43.3 U94.8 U128.16
PARMNXT: U32.35 U36.5
PARMST: U32.26 U36.2
PERDY: U33.2 U33.4 U33.13 U76.12 U95.5 U120.5
PIG: U14.5 U116.18 U121.2
PSD0: U31.9 U37.14 U45.14 U46.14 U48.14 U51.11 U115.3 U118.2
PSD1: U31.8 U37.15 U45.13 U46.13 U48.13 U51.10 U115.5 U118.3
PSD2: U31.7 U37.16 U45.11 U46.11 U48.11 U51.9 U115.7 U118.4
PSD3: U31.6 U37.17 U45.6 U46.6 U48.6 U51.8 U115.9 U118.5
PSD4: U31.5 U37.18 U45.4 U46.4 U48.4 U51.7 U115.12 U118.6
PSD5: U31.4 U37.19 U45.3 U46.3 U48.3 U51.6 U115.14 U118.7
PSD6: U31.3 U37.20 U47.14 U51.5 U115.16 U118.8
PSD7: U31.2 U37.21 U47.13 U51.4 U115.18 U118.9
PSD8: U37.22 U47.11 U51.3
PSD9: U37.23 U47.6 U51.2
PSD10: U35.14 U47.4
PSD11: U35.13 U47.3
PSD12: U35.11 U135.3
PSD13: U35.6 U135.5
PSD14: J4.54 U35.4 U135.7
PSD15: U35.3 U135.9
PUD8_4: U245.1 U245.19
PUD8_5: U246.1 U246.9 U246.19
PUD9_1: R289.2 U261.1
PUD9_2: R288.2 U260.33
PUD10_2: R12.2 U11.29
PUD10_3: R11.2 U11.7
PUD10_4: R10.2 U2.24
PUD10_5: R9.2 U6.11
PUD12_1: R62.2 U31.1
PUD12_2: R63.2 U32.11
PUD12_3: R66.2 U40.33
PUD13_1: R67.2 U51.1
PUD14_1: R75.2 U58.10
PUD14_2: R76.2 U57.11
PUD14_3: R77.2 U59.32
PUD15_1: R85.2 U90.8
PUD15_2: R87.2 U88.1 U93.1 U93.10 U96.1
PUD15_4: R97.2 U95.3
PUD17_1: R109.2 U120.11
PUD17_3: R112.2 U118.1
PUD18_2: R123.2 U123.17 U123.18 U123.19
PUD18_3: R116.2 U125.1
PUD18_4: U133.3 U133.4 U133.5 U133.6
PUD18_5: U129.3 U129.4 U129.5 U129.6
PUD18_6: U134.6 U134.7 U134.8 U134.9
PUD18_8: R121.2 U139.3 U139.4 U139.5 U139.6
PUD18_10: R115.2 U122.2 U304.4
PUP10_1: R6.2 U1.2 U1.4
PUP10_2: R7.2 U1.10 U1.13
PUP12_1: R60.2 U19.10 U19.12
PUP12_3: R64.2 U42.1 U42.4 U42.10 U42.13
PUP14_4: U73.2 U73.4
PUP15_1: R86.2 U90.3 U90.26
PUP15_2: U73.10 U73.13 U78.1 U78.4
PUP15_3: R89.2 U78.10 U78.12
PUP15_4: U77.2 U77.4
PUP15_5: R91.2 U77.10 U77.12
PUP17_1: R110.2 U114.1
PUP18_1: R129.2 U126.10 U126.12 U132.10 U132.13
PUP18_2: U129.9 U133.9 U139.7 U139.9 U139.10
PUP18_3: U126.1 U126.4 U132.1 U132.4
PUP18_4: R126.2 U138.26
PUP91: R286.2 U263.1 U263.4 U263.10 U263.13
PUP92: R287.2 U257.1 U257.4 U257.10 U257.13
PWR: U8.9 U8.10 U11.8
QT0: U51.14 U59.15
QT1: U51.15 U59.25
QT2: U51.16 U59.14
QT3: U51.17 U59.19
QT4: U51.18 U59.6
QT5: U51.19 U59.21
QT6: U51.20 U59.9
QT7: U51.21 U59.10
RACK: U113.13 U116.3 U242.6
RDACK: U33.12 U83.2 U83.11 U95.27 U128.35 U242.5
RDRDY: U33.11 U128.15
RDREQ: U95.9 U128.21
RF0: U125.17 U138.7 U258.19
RF1: U125.15 U138.6 U258.16 U304.2
RF2: U125.13 U138.5 U258.15
RF3: U125.11 U138.4 U258.12
RF4: U125.8 U138.31 U258.9
RF5: U125.6 U138.30 U258.6 U304.13
RF6: U125.4 U138.29 U258.5
RF7: U125.2 U138.28 U258.2 U304.3
RFD0: U82.11 U93.3 U130.19
RFD1: U82.12 U93.4 U130.18
RFD2: U82.13 U93.5 U130.17
RFD3: U82.14 U93.6 U130.16
RFD4: U82.15 U88.3 U130.15
RFD5: U82.16 U88.4 U130.14
RFD6: U82.17 U88.5 U130.13
RFD7: U82.18 U88.6 U130.12
RFD8: U80.11 U96.3 U134.19
RFD9: U80.12 U96.4 U134.18
RFD10: U80.13 U96.5 U134.17
RFD11: U80.14 U96.6 U134.16
RFD12: U43.11 U43.18 U80.15
RFD13: U43.13 U43.16 U80.16
RFD14: U43.14 U43.15 U80.17
RFD15: U43.12 U43.17 U80.18
RFLAST: U113.4 U128.20
RPA4: U113.39 U128.3
RPA5: U113.17 U128.2
RPACK: U33.5 U83.5 U83.12 U95.26 U128.19 U242.4
RPRDY: U33.6 U128.10
RPREQ: U95.10 U128.27
RS0: U122.8 U260.18
RS1: U122.4 U260.17
RS2: U122.6 U260.20
RT0: U2.2 U4.40 U58.25 U113.15 U122.42 U128.8
RT1: U2.3 U4.37 U58.11 U113.14 U122.41 U128.9
RTSTR: U2.32 U4.21 U58.32
RXD0: U28.2 U264.6
RXD1: U28.7 U264.5
RXD2: U28.10 U264.4
RXD3: U28.15 U264.3
RXDM0: U28.4 U245.12
RXDM1: U28.5 U245.13
RXDM2: U28.12 U245.14
RXDM3: U28.13 U245.15
RXDONE: U126.11 U130.11 U134.11 U260.16
RXQS_10: U122.21 U261.14 U266.1
RXST: U2.11 U4.17 U114.3 U128.11 U260.31 U304.7
RXTO: U10.3 U122.36 U260.40
SCLK: U14.11 U122.35 U259.35 U260.35 U261.13 U265.7 U266.8
SCT0: U57.2 U58.9
SCT1: U57.4 U58.19
SE0: U2.39 U3.7 U40.4
SE180: U2.29 U3.10 U40.10
SL0: U2.33 U3.12 U40.17
SL180: U2.17 U3.15 U40.19
SLOT: U1.11 U2.27 U4.3 U25.8
SLOTCLK: U6.35 U25.5 U25.12
SLOTL0: U6.20 U48.15
SLOTL1: U6.37 U48.12
SLOTL2: U6.36 U48.10
SLOTL3: U6.15 U48.7
SLOTL4: U6.33 U48.5
SLOTL5: U6.13 U48.2
SM0: U2.36 U3.2 U40.16
SM180: U2.37 U3.5 U40.18
STDMA: U94.9 U113.36 U116.21
SYMCLK: R25.2 R33.2 U23.13 U58.35 U59.13
SYMCLK1: U4.35 U5.11 U10.35 U11.13 U17.1 U18.3 U23.12
SYMCLK2: R22.2 R30.2 U23.16
SYMCLKM: U9.2 U21.2 U23.5 U23.8 U23.9 U24.2 U28.9 U245.11
SYMCLKN: U2.35 U23.17 U303.3 U303.11
SYMLD: U20.12 U264.10
TC0: U122.10 U260.30
TC1: U122.11 U260.28
TC2: U122.13 U260.27
TC3: U122.32 U260.26
TDACK: U76.13 U81.13 U83.3 U95.25
TDRDY: J4.42 U76.11 U94.19
TF0: U90.10 U265.14
TF1: U90.11 U265.12
TF2: U90.13 U265.11
TF3: U90.14 U265.10
TF4: U90.19 U265.5
TF5: U90.20 U265.4
TF6: U90.21 U265.3
TF7: U90.22 U265.2
TFAN: U4.4 U8.8
TFDONE: U10.16 U77.11 U260.8
TFLAST: U77.5 U260.37
TPACK: J4.23 U33.1 U81.12 U83.6 U94.11 U95.24
TPRDY: U33.3 U94.10
TRC0: U2.43 U47.15
TRC1: U2.42 U47.12
TRC2: U2.41 U47.10
TRC3: U2.28 U47.7
TTP: U10.7 U11.11 U58.39
TTPDONE: U10.17 U57.20 U58.41 U260.21
TXQS: U10.4 U262.9
TXST: U4.16 U16.3 U114.14 U241.3 U260.38
TXTO: U10.18 U33.8 U81.9
VDD: C18.1 C27.1 C28.1 C29.1 C38.1 C39.1 C45.1 C46.1 C48.1 C50.1 C51.1 C53.1 C55.1 C57.1 C59.1 C60.1 C61.1 C67.1 C70.1 C73.1 C79.1 C80.1 C83.1 C85.1 C88.1 C90.1 C104.1 C106.1 C112.1 C119.1 C123.1 C124.1 C126.1 C127.1 C128.1 C130.1 C134.1 C140.1 C141.1 C143.1 C161.1 C163.1 C164.1 C165.1 C166.1 C167.1 C168.1 C170.1 C173.1 C180.1 C181.1 C186.1 C189.1 C191.1 C192.1 C193.1 C195.2 C196.1 C197.1 C198.1 C202.1 C205.1 C212.1 C213.1 C214.1 C216.1 C223.1 C225.1 C232.1 C241.1 C242.1 C244.1 C249.1 C250.1 C253.1 C254.1 C258.1 C261.1 C262.1 C264.1 C266.1 C267.2 C274.1 C280.1 C282.1 C287.1 C288.1 C291.1 C299.1 R1.1 R3.1 R5.1 R6.1 R7.1 R15.1 R16.1 R20.1 R22.1 R23.1 R24.1 R25.1 R37.1 R43.1 R58.1 R60.1 R64.1 R86.1 R89.1 R91.1 R110.1 R113.1 R126.1 R129.1 R212.1 R213.1 R281.1 R284.1 R286.1 R287.1 R291.1 U1.14 U2.22 U2.44 U3.16 U4.22 U4.44 U5.14 U6.22 U6.44 U8.14 U9.14 U10.22 U10.44 U11.22 U11.44 U14.14 U15.14 U16.14 U17.14 U18.1 U18.4 U18.10 U18.12 U18.14 U19.2 U19.4 U19.14 U20.20 U21.14 U22.16 U23.20 U24.16 U25.14 U28.16 U31.20 U32.22 U32.44 U33.14 U35.16 U36.16 U37.24 U39.14 U40.22 U40.44 U42.14 U43.20 U45.16 U46.16 U47.16 U48.16 U51.24 U57.22 U57.44 U58.22 U58.44 U59.22 U59.44 U73.14 U76.14 U77.14 U78.14 U80.20 U81.14 U82.20 U83.14 U87.14 U88.16 U89.20 U90.32 U91.20 U92.16 U93.16 U94.22 U94.44 U95.28 U96.16 U113.22 U113.44 U114.16 U115.20 U116.22 U116.44 U118.20 U120.20 U121.14 U122.22 U122.44 U123.20 U125.20 U126.14 U128.22 U128.44 U129.16 U130.20 U132.14 U133.16 U134.20 U135.20 U136.20 U137.20 U138.32 U139.16 U193.24 U200.20 U218.14 U241.14 U242.14 U245.20 U246.20 U257.14 U258.20 U259.22 U259.44 U260.22 U260.44 U261.24 U262.16 U263.14 U264.16 U265.16 U266.14 U268.16 U303.14
VDD1: J4.35 U2.14 U10.36 U128.43 U259.26 U260.36
XB0: U43.9 U92.5
XB1: U43.7 U92.4
XISP: U43.5 U92.12
XMTCRC: U259.11 U260.6
XSTXPWR: U200.2 U245.18
XT0: U4.36 U92.7
XT1: J4.4 U4.43 U15.1 U92.2
ZERO: U81.8 U94.16
pads on no net: J4.2 J4.3 J4.7 J4.8 J4.11 J4.14 J4.15 J4.19 J4.27 J4.34 J4.36 J4.43 J4.47 J4.51 J4.55 J4.56 J4.59 J4.60 J4.61 J4.62 U1.6 U2.6 U2.7 U2.8 U2.10 U2.15 U2.16 U2.18 U2.19 U2.20 U2.21 U2.25 U2.26 U2.40 U2.45 U2.46 U4.5 U4.7 U4.8 U4.9 U4.19 U4.30 U4.31 U4.32 U4.38 U4.39 U4.41 U4.42 U4.45 U4.46 U5.5 U5.6 U5.8 U5.9 U6.3 U6.6 U6.14 U6.16 U6.17 U6.21 U6.26 U6.27 U6.28 U6.29 U6.30 U6.31 U6.32 U6.38 U6.39 U6.41 U6.42 U6.43 U6.45 U6.46 U8.3 U8.4 U8.5 U8.6 U9.11 U9.13 U10.15 U10.24 U10.27 U10.28 U10.29 U10.37 U10.38 U10.39 U10.40 U10.41 U10.42 U10.43 U10.45 U10.46 U11.4 U11.9 U11.14 U11.17 U11.20 U11.21 U11.24 U11.25 U11.28 U11.30 U11.31 U11.36 U11.37 U11.39 U11.40 U11.41 U11.42 U11.43 U11.45 U11.46 U16.4 U16.6 U16.8 U16.13 U17.11 U17.12 U17.13 U18.9 U19.6 U19.8 U19.9 U19.13 U20.3 U20.4 U20.5 U20.6 U20.7 U20.8 U20.9 U20.16 U20.17 U20.18 U20.19 U21.5 U21.9 U22.9 U23.7 U24.11 U24.13 U24.15 U25.6 U25.9 U28.3 U28.6 U28.11 U28.14 U32.2 U32.3 U32.4 U32.6 U32.7 U32.8 U32.9 U32.14 U32.15 U32.16 U32.24 U32.27 U32.28 U32.29 U32.30 U32.31 U32.36 U32.38 U32.39 U32.40 U32.41 U32.42 U32.45 U32.46 U33.9 U33.10 U36.7 U36.10 U36.15 U37.1 U39.3 U40.9 U40.14 U40.15 U40.21 U40.24 U40.25 U40.26 U40.27 U40.28 U40.29 U40.30 U40.31 U40.36 U40.38 U40.39 U40.45 U40.46 U42.11 U43.19 U45.2 U45.5 U45.7 U45.9 U45.10 U45.12 U45.15 U46.2 U46.5 U46.7 U46.9 U46.10 U46.12 U46.15 U47.2 U47.5 U51.13 U57.7 U57.8 U57.9 U57.10 U57.15 U57.16 U57.17 U57.18 U57.24 U57.25 U57.26 U57.27 U57.28 U57.29 U57.30 U57.32 U57.36 U57.37 U57.38 U57.39 U57.40 U57.41 U57.42 U57.43 U57.45 U57.46 U58.2 U58.3 U58.4 U58.5 U58.7 U58.8 U58.16 U58.20 U58.21 U58.26 U58.27 U58.28 U58.29 U58.30 U58.31 U58.36 U58.37 U58.40 U58.45 U58.46 U59.2 U59.3 U59.4 U59.5 U59.7 U59.8 U59.24 U59.26 U59.27 U59.28 U59.29 U59.30 U59.31 U59.36 U59.37 U59.39 U59.40 U59.41 U59.42 U59.45 U59.46 U73.3 U73.6 U73.9 U76.4 U76.8 U77.1 U77.6 U77.8 U78.6 U78.8 U81.10 U83.1 U83.8 U83.13 U88.11 U88.12 U88.13 U88.14 U90.1 U90.12 U90.15 U90.17 U90.23 U90.27 U92.3 U92.11 U92.13 U92.14 U92.15 U93.11 U93.12 U93.13 U93.14 U94.14 U94.17 U94.18 U94.20 U94.25 U94.29 U94.32 U94.37 U94.38 U94.39 U94.40 U94.45 U94.46 U95.1 U95.8 U95.13 U95.15 U95.16 U95.17 U95.18 U95.19 U95.20 U95.22 U96.11 U96.12 U96.13 U96.14 U96.15 U113.16 U113.30 U113.31 U113.37 U113.40 U113.45 U113.46 U114.15 U116.2 U116.8 U116.11 U116.14 U116.30 U116.31 U116.37 U116.38 U116.42 U116.45 U116.46 U118.11 U118.12 U118.13 U118.14 U120.2 U120.6 U120.7 U120.8 U120.9 U120.12 U120.13 U120.14 U120.15 U120.16 U120.17 U120.19 U121.8 U121.9 U121.10 U121.11 U121.12 U121.13 U122.3 U122.7 U122.9 U122.14 U122.15 U122.16 U122.17 U122.18 U122.19 U122.20 U122.24 U122.26 U122.27 U122.28 U122.30 U122.31 U122.43 U122.45 U122.46 U123.1 U123.6 U123.11 U123.16 U126.6 U126.8 U128.4 U128.5 U128.6 U128.26 U128.30 U128.31 U128.32 U128.36 U128.37 U128.38 U128.39 U128.40 U128.42 U128.45 U128.46 U132.6 U132.8 U133.15 U134.12 U134.13 U134.14 U134.15 U135.1 U135.2 U135.4 U135.6 U135.8 U135.12 U135.14 U135.18 U138.1 U138.8 U138.12 U138.15 U138.17 U138.23 U138.25 U138.27 U193.3 U193.4 U193.5 U193.6 U193.7 U193.8 U193.9 U193.10 U193.11 U193.13 U193.15 U193.16 U193.17 U193.19 U193.20 U193.21 U193.22 U200.11 U200.12 U200.13 U200.14 U200.15 U200.16 U200.17 U200.18 U218.1 U218.3 U218.5 U218.8 U218.11 U218.13 U241.5 U241.6 U241.8 U241.10 U241.11 U241.12 U241.13 U242.10 U245.2 U245.3 U245.4 U245.5 U245.6 U245.7 U245.8 U245.9 U245.17 U246.2 U246.3 U246.4 U246.5 U246.6 U246.7 U246.8 U246.11 U257.6 U257.8 U259.3 U259.4 U259.5 U259.6 U259.7 U259.8 U259.9 U259.14 U259.15 U259.16 U259.17 U259.18 U259.19 U259.20 U259.21 U259.24 U259.25 U259.27 U259.28 U259.30 U259.36 U259.37 U259.38 U259.39 U259.40 U259.41 U259.45 U259.46 U260.45 U260.46 U262.12 U263.6 U263.8 U264.15 U265.6 U268.9 U303.6 U303.8 U304.1 U304.8 U304.9 U304.10 U304.12

## Keep-outs
KeepOutLayer:
  the board outline again, w12

## Silkscreen, mask and mechanical layers (free items; w line width, h text height)
Mechanical1:
  text "+" at 4825,7750 h300
  text "+" at 1075,5950 h300
  text "+" at 3900,3300 h45